# Altium PCB iTOP4412_convertor_4.3Clasics_v1_5.PcbDoc (part 1 of 2)
Units mil, origin at the board's own origin, x right, y up, seen from the top; angles counter-clockwise.
Board outline 4346 x 3286 mil, 2 copper layers (TOP, BOTTOM), stack 10.4 mil thick; 67 components, 78 nets, 328 pads, 290 vias.
Unrouted connection lines stored in the file: 26.
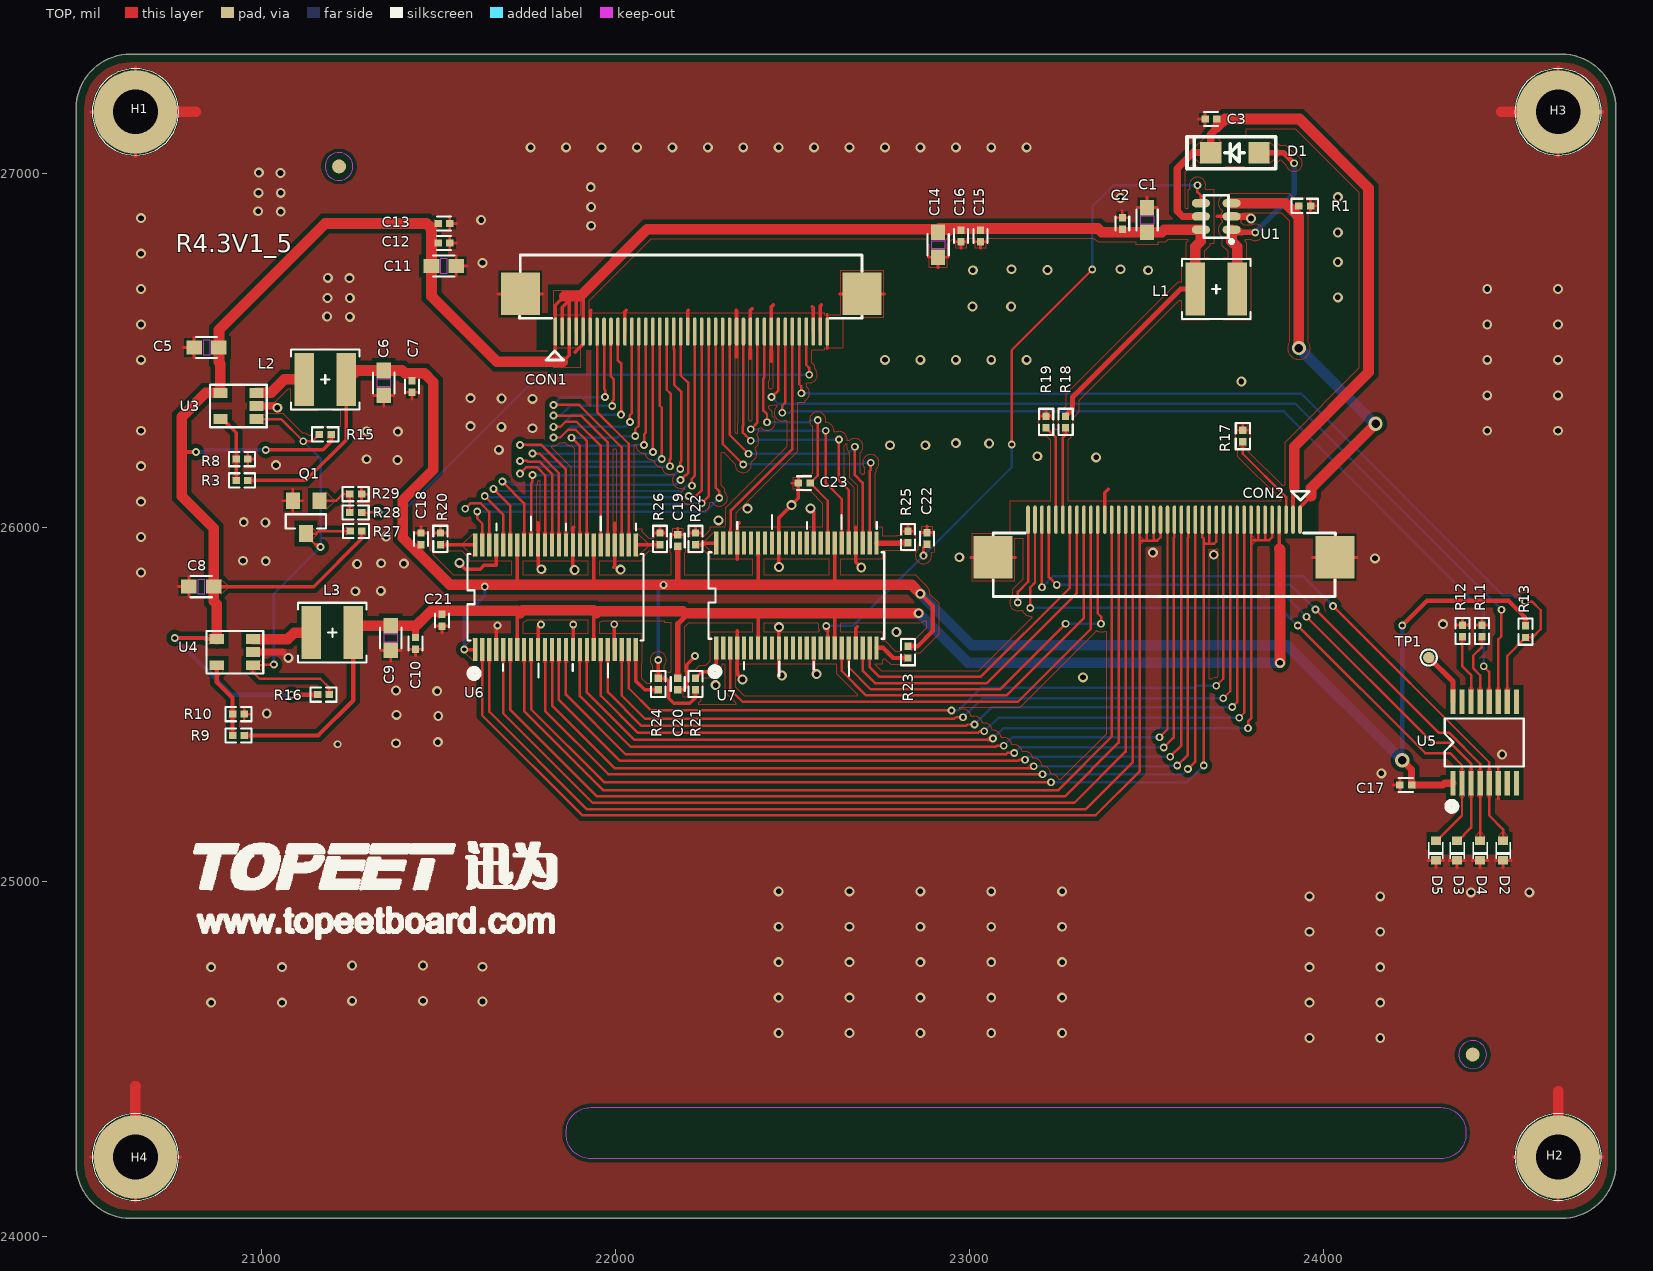
[diagram p0: TOP view]
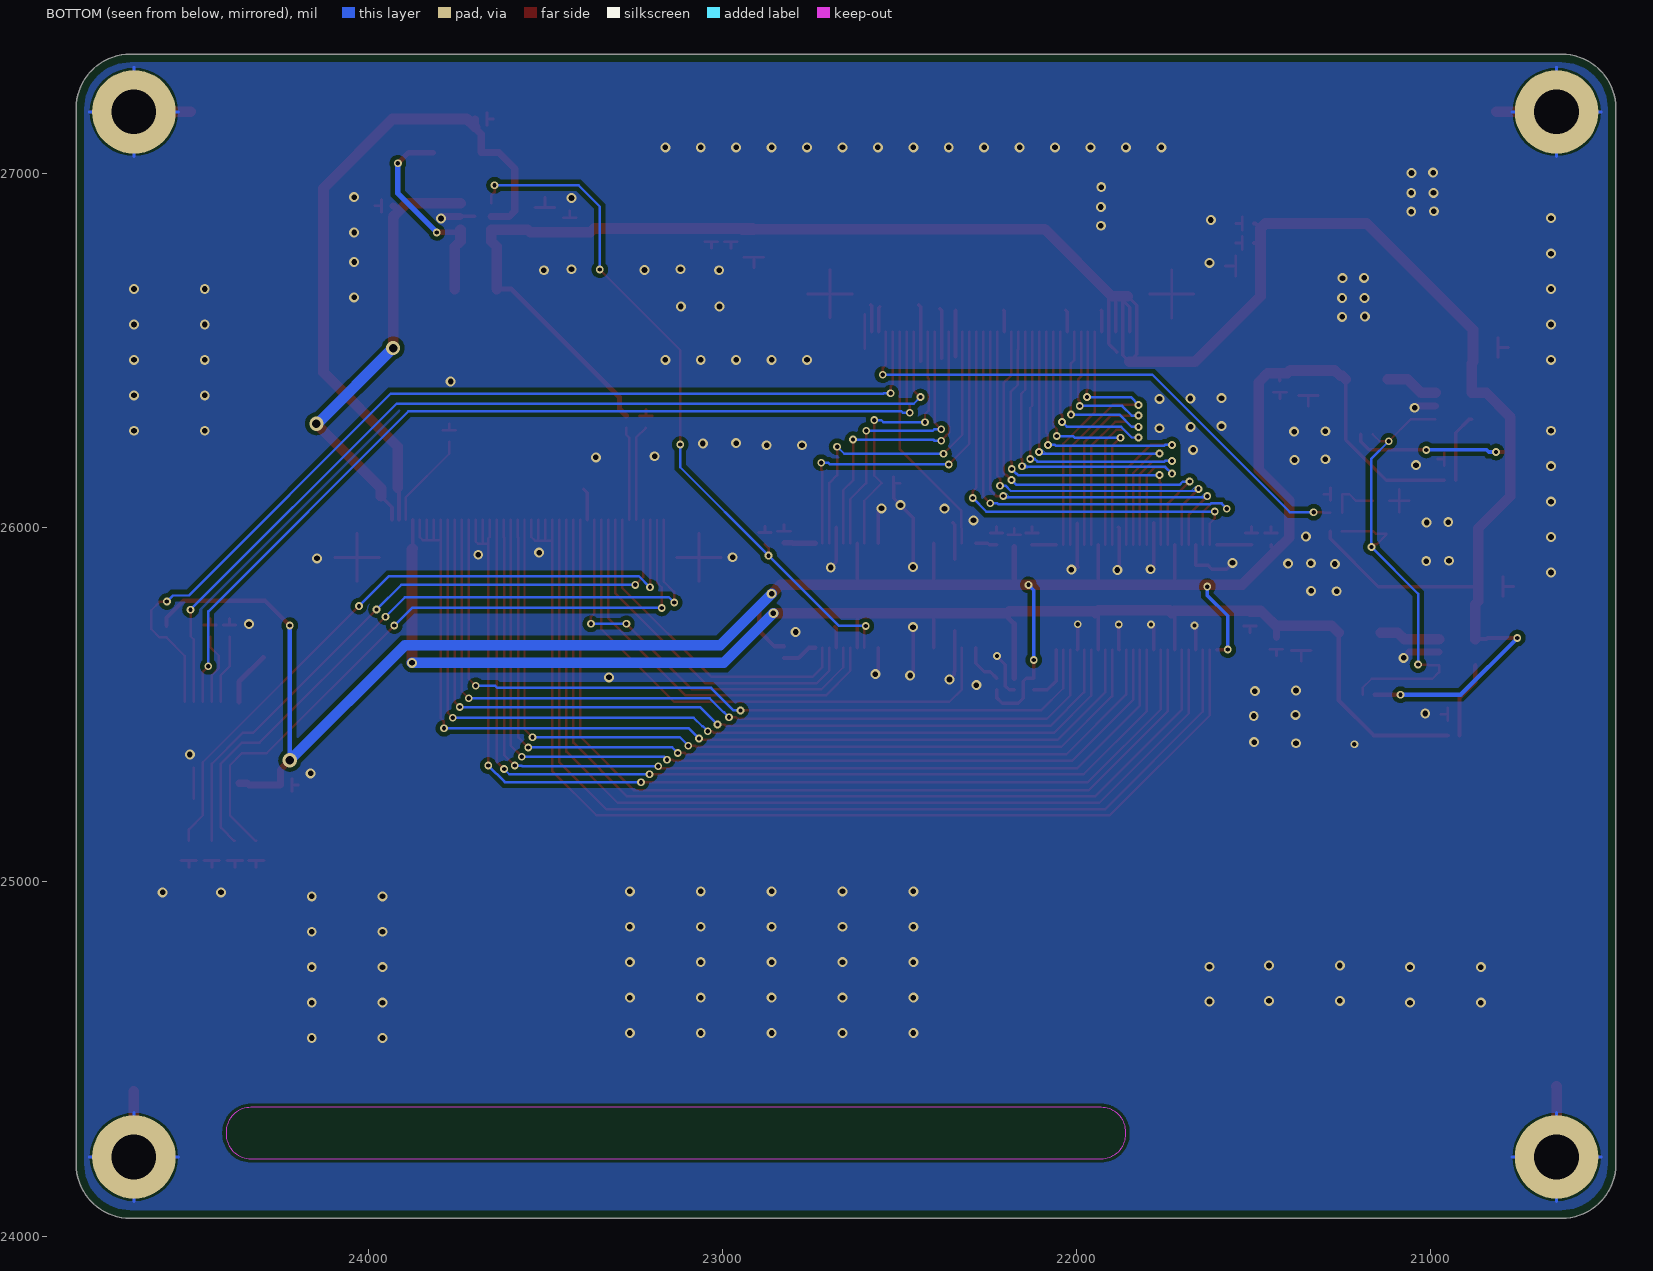
[diagram p1: BOTTOM view, seen from below]

## Layer stack, top to bottom
TOP: signal copper 1.2
Dielectric: core 8, FR-4, Dk 4.5
BOTTOM: signal copper 1.2

## Board outline
20478.08,24203.41 ccw(c20631.08,24203.41) 20631.08,24050.41 24671.08,24050.41 ccw(c24671.08,24203.41) 24824.08,24203.41 24824.08,27183.41 ccw(c24671.08,27183.41) 24671.08,27336.41 20631.08,27336.41 ccw(c20631.08,27183.41) 20478.08,27183.41

## Design rules (kind name [scope] priority, off if disabled: settings)
Clearance [All] p1: gap=10
PlaneConnect [All] p1: planeconnectstyle=Direct reliefexpansion=20 reliefentries=4 reliefconductorwidth=10 reliefairgap=10
PolygonConnect [All] p1: connectstyle=Direct reliefconductorwidth=10 reliefentries=4 polygonreliefangle="90 Angle"
RoutingVias [All] p1: holewidth=28 width=50 viastyle="Through Hole" minholewidth=28 minwidth=50 maxholewidth=28 maxwidth=50
SilkscreenOverComponentPads [All] p1: minsilkscreentomaskgap=10
SolderMaskExpansion [All] p1: expansion=4
Width [All] p1: maxlimit=10 minlimit=10 preferedwidth=10 impedancedriven=TRUE minimp=88.540000 maximp=121.240000 favimp=73.760000
26 further rules are at their usual default settings.

## Components (designator, comment, footprint, x,y, rotation, side; value= is the part's Value field where it differs from the comment)
C1 "CAP POL_C0603_10UF/16V" C0603 23501.08,26868.41 r90 top
C2 "C1005_C0402_0.1UF" C0402 23431.08,26858.41 r270 top
C3 "C1005_C0402_1UF/25V" C0402 23681.08,27153.41 r0 top
C5 "C1005_C0603_4.7UF" C0603 20846.08,26508.41 r0 top
C6 "C1005_C0603_10UF" C0603 21346.08,26408.41 r90 top
C7 "C1005_C0402_0.1UF" C0402 21426.08,26398.41 r90 top
C8 "C1005_C0603_4.7UF" C0603 20831.08,25833.41 r0 top
C9 "C1005_C0603_10UF" C0603 21366.08,25688.41 r90 top
C10 "C1005_C0402_0.1UF" C0402 21436.08,25673.41 r90 top
C11 "C1608_C0603_10UF" C0603 21516.08,26738.41 r0 top
C12 "C0402_0_C0402_1UF" C0402 21516.08,26803.41 r0 top
C13 "C0402_0_C0402_0.1UF" C0402 21516.08,26858.41 r0 top
C14 "C1608_C0603_10UF" C0603 22911.08,26798.41 r270 top
C15 "C0402_0_C0402_100NF" C0402 23031.08,26823.41 r270 top
C16 "C0402_0_C0402_100NF" C0402 22976.08,26823.41 r270 top
C17 "C0603_0_C0402_0.1UF" C0402 24231.08,25273.41 r180 top
C18 "C0603_0_C0402_0.1UF" C0402 21451.08,25968.41 r90 top
C19 "C0603_0_C0402_0.1UF" C0402 22176.08,25963.41 r90 top
C20 "C0603_0_C0402_0.1UF" C0402 22176.08,25558.41 r270 top
C21 "C0603_0_C0402_0.1UF" C0402 21511.08,25738.41 r270 top
C22 "C1005_C0402_0.1UF" C0402 22880.08,25969.41 r270 top
C23 "C0603_0_C0402_0.1UF" C0402 22533.08,26125.41 r0 top
CON1 "CON40_0_1_FPC40-050_CON40_0_5MM" FPC40-050 22213.04,26643.96 r0 top
CON2 "CON40_0_1_FPC40-050_CON40_0_5MM" FPC40-050 23549.77,25931.85 r180 top
D1 "DIODE SCHOTTKY_D1206_IN5819" D1206 23746.08,27058.41 r0 top
D2 "BZX84C10/SOT_1_SOD-523_BZX84C10" SOD-523 24506.08,25088.41 r90 top
D3 "BZX84C10/SOT_1_SOD-523_BZX84C10" SOD-523 24376.08,25088.41 r90 top
D4 "BZX84C10/SOT_1_SOD-523_BZX84C10" SOD-523 24441.08,25088.41 r90 top
D5 "BZX84C10/SOT_1_SOD-523_BZX84C10" SOD-523 24316.08,25088.41 r90 top
H1 "TP_P0_0.8_D0_HOLE3_2X6_TP_P0_0." HOLE3_2X6 20645.33,27173.41 r0 top
H2 "TP_P0_0.8_D0_HOLE3_2X6_TP_P0_0." HOLE3_2X6 24661.08,24223.41 r0 top
H3 "TP_P0_0.8_D0_HOLE3_2X6_TP_P0_0." HOLE3_2X6 24661.08,27173.41 r0 top
H4 "TP_P0_0.8_D0_HOLE3_2X6_TP_P0_0." HOLE3_2X6 20645.33,24223.41 r0 top
L1 "LQH32C_1_IND4018_10UH" IND4018 23696.08,26673.41 r0 top
L2 "LQH32C_1_IND4018_2.2UH" IND4018 21181.08,26418.41 r0 top
L3 "LQH32C_1_IND4018_2.2UH" IND4018 21201.08,25703.41 r0 top
Q1 "L14P2/TO_1_SOT-23_L9014" SOT-23 21127.08,26029.41 r0 top
R1 "R1005_0_R0402_5.1R" R0402 23946.08,26908.41 r0 top
R3 "R1005_0_R0402_? 1%" R0402 20946.08,26133.41 r180 top
R8 "R1005_0_R0402_? 1%" R0402 20946.08,26193.41 r0 top
R9 "R1005_0_R0402_430K 1%" R0402 20936.08,25413.41 r180 top
R10 "R1005_0_R0402_100K 1%" R0402 20936.08,25473.41 r0 top
R11 "R0603_0_R0402_0R" R0402 24446.08,25708.41 r90 top
R12 "R0603_0_R0402_0R" R0402 24391.08,25708.41 r90 top
R13 "R0603_0_R0402_10K" R0402 24569.08,25706.41 r90 top
R15 "R0603_0_R0402_NC" R0402 21181.08,26263.41 r0 top
R16 "R0603_0_R0402_NC" R0402 21176.08,25528.41 r180 top
R17 "R0603_0_R0402_10K/NC" R0402 23771.08,26258.41 r90 top
R18 "R0603_0_R0402_0R" R0402 23271.08,26298.41 r90 top
R19 "R0603_0_R0402_10K/NC" R0402 23216.08,26298.41 r90 top
R20 "R0603_0_R0402_10K" R0402 21506.08,25968.41 r90 top
R21 "R0603_0_R0402_10K" R0402 22226.08,25558.41 r270 top
R22 "R0603_0_R0402_10K" R0402 22226.08,25968.41 r270 top
R23 "R0603_0_R0402_10K" R0402 22826.08,25648.41 r90 top
R24 "R0603_0_R0402_10K" R0402 22121.08,25558.41 r90 top
R25 "R0603_0_R0402_10K" R0402 22826.08,25973.41 r90 top
R26 "R0603_0_R0402_10K" R0402 22126.08,25968.41 r90 top
R27 "R_R0402_10K" R0402 21268.08,25990.41 r180 top
R28 "R_R0402_1K" R0402 21267.08,26042.41 r0 top
R29 "R_R0402_10K" R0402 21267.08,26094.41 r0 top
TP1 "TP_P0_0.8_D0_TP0_8-SMD_AUX" TP0_8-SMD 24296.08,25633.41 r0 top
U1 "TP3984_SOT23-6L_TP3984" SOT23-6L 23696.08,26878.41 r90 top
U3 "RT8059_TSOT-23-5_RT8059" TSOT-23-5 20936.08,26343.41 r90 top
U4 "RT8059_TSOT-23-5_RT8059" TSOT-23-5 20926.08,25648.41 r90 top
U5 "U-TSC2007IPW_TSSOP16_TSC2007IPW" TSSOP16 24453.08,25393.41 r90 top
U6 "74ALVC164245DGG" TSSOP_48 21831.08,25803.41 r0 top
U7 "74ALVC164245DGG" TSSOP_48 22511.08,25808.41 r0 top

## Footprints (in the part's own frame and the unit in brackets; to place one, negate y for a bottom-side part, rotate by r counter-clockwise, add the part's x,y. Pads: shape width x height; smd on the part's side, far side on the other; paste and mask are expansions set on the pad)
C0402 [mil] "C0402"
  rect 21x20 smd: 1(-16.5,0) 2(16.5,0)
  silkscreen extent -20,-20 20,20
C0603 [mil] "C0603"
  rect 44x40 smd: 1(-35,0) 2(35,0)
  TOP keep-out region: -10,-20 10,-20 10,20 -10,20 -10,-20
  silkscreen extent -30,-30 30,30
D1206 [mil] "D1206"
  rect 60x60 smd: 1(70.49,0) 2(-65.49,0)
  silkscreen extent -132,-45 118,45
FPC40-050 [mil] "FPC40-050"
  oval 10x80 smd: 1(-382.82,-90.55) 2(-363.13,-90.55) 3(-343.44,-90.55) 4(-323.76,-90.55) 5(-304.08,-90.55) 6(-284.39,-90.55) 7(-264.71,-90.55) 8(-245.02,-90.55) 9(-225.33,-90.55) 10(-205.65,-90.55) 11(-185.97,-90.55) 12(-166.28,-90.55) 13(-146.6,-90.55) 14(-126.91,-90.55) 15(-107.23,-90.55) 16(-87.54,-90.55) 17(-67.85,-90.55) 18(-48.17,-90.55) 19(-28.49,-90.55) 20(-8.8,-90.55) 21(10.89,-90.55) 22(30.57,-90.55) 23(50.26,-90.55) 24(69.94,-90.55) 25(89.63,-90.55) 26(109.31,-90.55) 27(129,-90.55) 28(148.68,-90.55) 29(168.37,-90.55) 30(188.05,-90.55) 31(207.74,-90.55) 32(227.42,-90.55) 33(247.11,-90.55) 34(266.79,-90.55) 35(286.48,-90.55) 36(306.16,-90.55) 37(325.85,-90.55) 38(345.53,-90.55) 39(365.22,-90.55) 40(384.9,-90.55)
  rect 110x120 smd: 41(-481.24,15.75) 42(483.33,15.75)
  silkscreen extent -483,-171 483,126
HOLE3_2X6 [mil] "HOLE3_2X6"
  round 236 hole 126: 1(0,0)
  silkscreen extent -122,-122 122,122
IND4018 [mm] "IND4018"
  rect 1.4x3.8 smd: 1(-1.5,0) 2(1.5,0)
  silkscreen extent -2.45,-2.15 2.45,2.15
R0402 [mil] "R0402"
  rect 21x20 smd: 1(-16.5,0) 2(16.5,0)
  silkscreen extent -37,-20 37,20
SOD-523 [mm] "SOD-523"
  rect 0.61x0.71 smd: 1(-0.7,0) 2(0.7,0)
  silkscreen extent -0.6,-0.5 0.6,0.5
SOT23-6L [mm] "SOT23-6L"
  oval 0.6x1.3 smd: 1(-0.95,-1.1) 2(0,-1.1) 3(0.95,-1.1) 4(0.95,1.1) 5(0,1.1) 6(-0.95,1.1)
  silkscreen extent -1.93,-1.23 1.52,0.87
SOT-23 [mm] "SOT-23"
  rect 1x1.2 smd: 1(0.953,1.175) 2(-0.953,1.175) 3(-0.013,-1.175)
  silkscreen extent -1.46,-0.81 1.44,0.21
TP0_8-SMD [mm] "TP0_8-SMD"
  round 0.8 smd: 1(0,0)
  silkscreen extent -0.58,-0.58 0.58,0.58
TSOT-23-5 [mil] "TSOT-23-5"
  rect 28x40 smd: 1(-37,-51) 2(0,-51) 3(37,-51) 4(37,51) 5(-37,51)
  silkscreen extent -60,-80 60,80
TSSOP16 [mil] "TSSOP16"
  rect 70x15 smd: 1(-115,88.8) 2(-115,63.2) 3(-115,37.6) 4(-115,12) 5(-115,-13.6) 6(-115,-39.2) 7(-115,-64.8) 8(-115,-90.4) 9(115,-90.4) 10(115,-64.8) 11(115,-39.2) 12(115,-13.6) 13(115,12) 14(115,37.6) 15(115,63.2) 16(115,88.8)
  silkscreen extent -191,-111 68,112
TSSOP_48 [mil] "TSSOP_48"
  rect 12x65 smd: 1(-226.38,-147.64) 2(-206.69,-147.64) 3(-187.01,-147.64) 4(-167.32,-147.64) 5(-147.64,-147.64) 6(-127.95,-147.64) 7(-108.27,-147.64) 8(-88.58,-147.64) 9(-68.9,-147.64) 10(-49.21,-147.64) 11(-29.53,-147.64) 12(-9.84,-147.64) 13(9.84,-147.64) 14(29.53,-147.64) 15(49.21,-147.64) 16(68.9,-147.64) 17(88.58,-147.64) 18(108.27,-147.64) 19(127.95,-147.64) 20(147.64,-147.64) 21(167.32,-147.64) 22(187.01,-147.64) 23(206.69,-147.64) 24(226.38,-147.64) 25(226.38,147.64) 26(206.69,147.64) 27(187.01,147.64) 28(167.32,147.64) 29(147.64,147.64) 30(127.95,147.64) 31(108.27,147.64) 32(88.58,147.64) 33(68.9,147.64) 34(49.21,147.64) 35(29.53,147.64) 36(9.84,147.64) 37(-9.84,147.64) 38(-29.53,147.64) 39(-49.21,147.64) 40(-68.9,147.64) 41(-88.58,147.64) 42(-108.27,147.64) 43(-127.95,147.64) 44(-147.64,147.64) 45(-167.32,147.64) 46(-187.01,147.64) 47(-206.69,147.64) 48(-226.38,147.64)
  silkscreen extent -248,-226 248,228

## Free pads (board coordinates)
  round 39.37 smd: ""(21220.08,27019.41) ""(24420.08,24512.41)

## Via types
v1: diameter 28, hole 16, TOP to BOTTOM, 182 vias
v2: diameter 22, hole 12, TOP to BOTTOM, 105 vias
v3: diameter 40, hole 24, TOP to BOTTOM, 3 vias

## Nets (pads, with @x,y where several pads share a name; then routed paths per layer and width w, separated by ;. In a path a pad name is that pad's centre, name@x,y a point inside that pad or via, vN(x,y) a via of type N, cw(c..) or ccw(c..) an arc to the next point about the centre after c; other vN are vias at no path point)
BUF_LCD_DEN: CON2.34 U7.23 | length 927.4
  TOP w7: U7.23@22717.77,25660.76 22717.77,25606.72 22746.08,25578.41 23031.08,25578.41 23282.98,25830.3 CON2.34@23282.98,26022.41
BUF_LCD_HSYNC: CON2.32 U7.19 | length 1145.4
  TOP w7: U7.19@22639.03,25660.76 22639.03,25595.46 22708.08,25526.41 23104.08,25526.41 23322.35,25744.67 CON2.32@23322.35,26022.41
BUF_LCD_VD3: CON2.21 CON2.22 CON2.23 CON2.24 U6.2 | length 3151.6
  TOP w7: U6.2@21624.39,25655.76 21624.39,25470.1 21906.08,25188.41 23356.08,25188.41 23479.83,25312.15 23479.83,25963.41 ; CON2.24@23479.83,26022.41 23479.83,25963.41 ; CON2.23@23499.51,26022.41 23499.51,25964.98 23501.08,25963.41 ; CON2.22@23519.2,26022.41 23519.2,25966.29 23522.08,25963.41 ; CON2.21@23538.88,26022.41 23538.88,25972.91 23529.38,25963.41 23522.08,25963.41 ; 23479.83,25963.41 23501.08,25963.41 ; 23501.08,25963.41 23522.08,25963.41
BUF_LCD_VD4: CON2.25 U6.3 | length 2845
  TOP w7: U6.3@21644.07,25655.76 21644.07,25480.42 21919.08,25205.41 23328.08,25205.41 23460.14,25337.47 CON2.25@23460.14,26022.41
BUF_LCD_VD5: CON2.26 U6.5 | length 2755.8
  TOP w7: U6.5@21683.44,25655.76 21683.44,25476.05 21936.08,25223.41 23296.08,25223.41 23440.46,25367.78 CON2.26@23440.46,26022.41
BUF_LCD_VD6: CON2.27 U6.6 | length 2680.7
  TOP w7: U6.6@21703.13,25655.76 21703.13,25486.35 21948.08,25241.41 23269.08,25241.41 23420.77,25393.1 CON2.27@23420.77,26022.41
BUF_LCD_VD7: CON2.28 U6.8 | length 2599.9
  TOP w7: U6.8@21742.5,25655.76 21742.5,25481.99 21966.08,25258.41 23249.08,25258.41 23401.09,25410.41 CON2.28@23401.09,26022.41
BUF_LCD_VD10: CON2.13 CON2.14 CON2.15 U6.9 | length 3037.2
  TOP w7: U6.9@21762.18,25655.76 21762.18,25487.31 21968.08,25281.41 v2(23230.08,25281.41) ; CON2.15@23656.99,26022.41 23656.99,25972.91 23661.08,25968.82 23661.08,25958.41 ; v2(23661.08,25328.41) 23661.08,25958.41 ; CON2.14@23676.68,26022.41 23676.68,25954.81 23677.08,25954.41 ; CON2.13@23696.36,26022.41 23696.36,25960.69 23690.08,25954.41 23677.08,25954.41 ; 23661.08,25958.41 23665.08,25954.41 23677.08,25954.41
  BOTTOM w7: v2(23230.08,25281.41) 23614.08,25281.41 v2(23661.08,25328.41)
BUF_LCD_VD11: CON2.16 U6.11 | length 2780.3
  TOP w7: U6.11@21801.55,25655.76 21801.55,25482.94 21980.58,25303.91 v2(23206.08,25303.91) ; v2(23616.08,25318.41) 23637.31,25339.63 CON2.16@23637.31,26022.41
  BOTTOM w7: v2(23206.08,25303.91) 23601.58,25303.91 v2(23616.08,25318.41)
BUF_LCD_VD12: CON2.17 U6.12 | length 2706.4
  TOP w7: U6.12@21821.24,25655.76 21821.24,25498.24 21999.08,25320.41 23175.08,25320.41 v2(23181.08,25326.41) ; v2(23586.08,25328.41) 23616.08,25358.41 23616.08,25971.37 23617.62,25972.91 CON2.17@23617.62,26022.41
  BOTTOM w7: v2(23181.08,25326.41) 23564.58,25326.41 23566.58,25328.41 v2(23586.08,25328.41)
BUF_LCD_VD13: CON2.18 U6.13 | length 2625.8
  TOP w7: U6.13@21840.92,25655.76 21840.92,25513.57 22013.08,25341.41 23136.08,25341.41 23139.58,25344.91 v2(23156.08,25344.91) ; v2(23566.08,25353.41) 23597.94,25385.26 CON2.18@23597.94,26022.41
  BOTTOM w7: v2(23156.08,25344.91) 23164.58,25353.41 v2(23566.08,25353.41)
BUF_LCD_VD14: CON2.19 U6.14 | length 2547.5
  TOP w7: U6.14@21860.61,25655.76 21860.61,25528.88 22029.08,25360.41 23103.08,25360.41 23106.58,25363.91 v2(23126.08,25363.91) ; v2(23548.08,25379.41) 23576.08,25407.41 23576.08,25970.74 23578.25,25972.91 CON2.19@23578.25,26022.41
  BOTTOM w7: v2(23126.08,25363.91) 23141.58,25379.41 v2(23548.08,25379.41)
BUF_LCD_VD15: CON2.20 U6.16 | length 2461.1
  TOP w7: U6.16@21899.98,25655.76 21899.98,25524.5 22043.08,25381.41 23073.58,25381.41 23076.58,25384.41 v2(23096.08,25384.41) ; v2(23536.08,25408.41) 23558.57,25430.89 CON2.20@23558.57,26022.41
  BOTTOM w7: v2(23096.08,25384.41) 23120.08,25408.41 v2(23536.08,25408.41)
BUF_LCD_VD19: CON2.5 CON2.6 CON2.7 CON2.8 U6.17 | length 2876.8
  TOP w7: U6.17@21919.66,25655.76 21919.66,25534.83 22053.08,25401.41 23062.58,25401.41 v2(23066.08,25404.91) ; v2(23786.08,25433.41) 23786.08,25452.91 23794.79,25461.61 23794.79,25964.41 ; CON2.8@23794.79,26022.41 23794.79,25964.41 ; CON2.7@23814.47,26022.41 23814.47,25964.8 23814.08,25964.41 ; CON2.6@23834.16,26022.41 23834.16,25964.48 23834.08,25964.41 ; CON2.5@23853.84,26022.41 23853.84,25972.91 23845.34,25964.41 23834.08,25964.41 ; 23794.79,25964.41 23814.08,25964.41 ; 23814.08,25964.41 23834.08,25964.41
  BOTTOM w7: v2(23066.08,25404.91) 23094.58,25433.41 v2(23786.08,25433.41)
BUF_LCD_VD20: CON2.9 U6.19 | length 2558.5
  TOP w7: U6.19@21959.03,25655.76 21959.03,25525.46 22064.08,25420.41 23024.08,25420.41 23029.08,25425.41 v2(23041.08,25425.41) ; v2(23761.08,25463.41) 23775.1,25477.43 CON2.9@23775.1,26022.41
  BOTTOM w7: v2(23041.08,25425.41) 23054.87,25439.19 23056.87,25439.19 23081.08,25463.41 v2(23761.08,25463.41)
BUF_LCD_VD21: CON2.10 U6.20 | length 2478.7
  TOP w7: U6.20@21978.72,25655.76 21978.72,25535.76 22074.08,25440.41 22990.21,25440.41 22994.09,25444.29 v2(23013.59,25444.29) ; v2(23741.08,25493.41) 23754.87,25507.19 23754.87,25517.19 23755.42,25517.74 CON2.10@23755.42,26022.41
  BOTTOM w7: v2(23013.59,25444.29) 23062.71,25493.41 v2(23741.08,25493.41)
BUF_LCD_VD22: CON2.11 U6.22 | length 2390.9
  TOP w7: U6.22@22018.09,25655.76 22018.09,25526.39 22084.08,25460.41 22957.2,25460.41 22961.58,25464.79 v2(22981.08,25464.79) ; v2(23716.08,25518.41) 23735.73,25538.06 CON2.11@23735.73,26022.41
  BOTTOM w7: v2(22981.08,25464.79) 22994.87,25478.58 22996.25,25478.58 23036.08,25518.41 v2(23716.08,25518.41)
BUF_LCD_VD23: CON2.12 U6.23 | length 2299.4
  TOP w7: U6.23@22037.77,25655.76 22037.77,25546.72 22100.58,25483.91 v2(22949.06,25483.91) ; v2(23696.08,25553.41) 23716.05,25573.37 CON2.12@23716.05,26022.41
  BOTTOM w7: v2(22949.06,25483.91) 22968.56,25483.91 23032.06,25547.41 23289.87,25547.41 ; 23289.88,25547.41 23635.08,25547.41 23641.08,25553.41 v2(23696.08,25553.41)
BUF_LCD_VOTCLK: CON2.30 U7.20 | length 1167.7
  TOP w7: U7.20@22658.72,25660.76 22658.72,25605.76 22721.08,25543.41 23086.08,25543.41 v2(23271.08,25728.41) ; CON2.30@23361.72,26022.41 23361.72,25757.77 23371.08,25748.41 v2(23371.08,25728.41)
  BOTTOM w7: v2(23271.08,25728.41) v2(23371.08,25728.41)
BUF_LCD_VSYNC: CON2.33 U7.22 | length 996.7
  TOP w7: U7.22@22698.09,25660.76 22698.09,25596.39 22734.08,25560.41 23048.08,25560.41 23302.66,25814.99 CON2.33@23302.66,26022.41
BUF_MD_RSTN: CON2.31 U7.3 | length 1543.2
  TOP w7: U7.3@22324.07,25660.76 22324.07,25543.42 22359.08,25508.41 23136.08,25508.41 23342.03,25714.35 CON2.31@23342.03,26022.41
BUF_XPWMTOUT1: C22.2 U1.4 U7.17 | length 2016
  TOP w7: v2(22595.08,25722.41) 22599.66,25717.83 U7.17@22599.66,25660.76 ; v2(22869.58,25920.91) 22869.58,25942.41 C22.2@22880.08,25952.91 ; v2(23119.08,26234.41) 23119.08,26501.41 v2(23346.08,26728.41) ; v2(23643.08,26966.41) 23643.08,26946.82 23652.78,26937.12 U1.4@23652.78,26915.81
  BOTTOM w7: v2(22595.08,25722.41) 22671.08,25722.41 v2(22869.58,25920.91) 23119.08,26170.41 v2(23119.08,26234.41) ; v2(23346.08,26728.41) 23346.08,26906.41 23406.08,26966.41 v2(23643.08,26966.41)
CAM5M_RST: CON1.37 R28.2 | length 1549.9
  TOP w7: R28.2@21283.58,26042.41 21303.58,26042.41 21304.58,26043.41 v2(21331.08,26043.41) ; CON1.37@22538.88,26553.41 22538.88,26459.3 22547.08,26451.1 v2(22547.08,26431.6)
  BOTTOM w7: v2(21331.08,26043.41) 21398.08,26043.41 21786.28,26431.6 v2(22547.08,26431.6)
DC33V: C9.2 C10.2 C20.1 C21.1 CON2.4 L3.2 R9.1 U6.7 U6.18 U7.7 U7.18 | length 4334
  TOP w10: U6.7@21722.81,25655.76 21722.81,25750.13 21731.08,25758.41 ; U6.18@21939.35,25655.76 21939.35,25751.68 21946.08,25758.41 ; 22401.08,25758.41 22402.81,25756.68 U7.7@22402.81,25660.76 ; 22611.08,25758.41 22619.35,25750.13 U7.18@22619.35,25660.76 ; 23873.53,25940.85 CON2.4@23873.53,26022.41
  TOP w12: R9.1@20952.58,25413.41 21161.08,25413.41 21260.14,25512.46 L3.2@21260.14,25703.41
  TOP w15: 21473.08,25758.41 21476.58,25754.91 C21.1@21511.08,25754.91 ; C20.1@22176.08,25574.91 22176.08,25728.41 22196.08,25748.41 22196.08,25758.41
  TOP w20: C10.2@21436.08,25689.91 21436.08,25721.41
  TOP w30: L3.2@21260.14,25703.41 21280.14,25723.41 C9.2@21366.08,25723.41 21434.08,25723.41 21436.08,25721.41 21473.08,25758.41 21480.08,25765.41 21724.08,25765.41 21731.08,25758.41 21739.08,25766.41 21938.08,25766.41 21946.08,25758.41 21952.08,25764.41 22190.08,25764.41 22196.08,25758.41 22401.08,25758.41 22611.08,25758.41 v1(22856.08,25758.41) ; 23873.53,25940.85 23876.08,25938.3 v1(23876.08,25618.41)
  BOTTOM w30: v1(22856.08,25758.41) 22996.08,25618.41 v1(23876.08,25618.41)
GND: C1.2 C2.1 C3.1 C5.1 C6.1 C7.1 C8.1 C9.1 C10.1 C11.2 C12.2 C13.2 C14.2 C15.2 C16.2 C17.2 C18.2 C19.2 C20.2 C21.2 C22.1 C23.1 CON1.6 CON1.11 CON1.20 CON1.27 CON1.29 CON1.32 CON1.38 CON1.39 CON1.40 CON1.41 CON1.42 CON2.29 CON2.41 CON2.42 D2.1 D3.1 D4.1 D5.1 H1.1 H2.1 H3.1 H4.1 Q1.2 R1.2 R8.2 R10.2 R11.2 R12.2 R17.2 R19.2 R20.2 R22.1 R25.2 R26.2 R29.2 U1.2 U3.2 U4.2 U5.6 U6.4 U6.10 U6.15 U6.21 U6.28 U6.34 U6.39 U6.45 U7.4 U7.10 U7.15 U7.21 U7.28 U7.34 U7.39 U7.45 | length 10945.7
  TOP w8: 20519.33,24223.41 H4.1@20645.33,24223.41 ; 20519.33,27173.41 H1.1@20645.33,27173.41 ; 20645.33,24097.4 H4.1@20645.33,24223.41 ; 20645.33,27047.4 H1.1@20645.33,27173.41 ; 20645.33,27299.41 H1.1@20645.33,27173.41 ; 20766.08,25833.41 C8.1@20796.08,25833.41 ; 20771.34,24223.41 H4.1@20645.33,24223.41 ; 20781.08,26508.41 C5.1@20811.08,26508.41 ; 20796.08,25805.4 C8.1@20796.08,25833.41 ; 20796.08,25861.41 C8.1@20796.08,25833.41 ; 20811.08,26480.4 C5.1@20811.08,26508.41 ; 20811.08,26536.41 C5.1@20811.08,26508.41 ; 20952.58,25455.4 R10.2@20952.58,25473.41 ; 20952.58,25491.41 R10.2@20952.58,25473.41 ; 20962.58,26175.4 R8.2@20962.58,26193.41 ; 20962.58,26211.41 R8.2@20962.58,26193.41 ; 20971.08,25473.41 R10.2@20952.58,25473.41 ; 20981.08,26193.41 R8.2@20962.58,26193.41 ; 21061.9,26075.66 Q1.2@21089.58,26075.66 ; 21089.58,26044.03 Q1.2@21089.58,26075.66 ; 21089.58,26107.28 Q1.2@21089.58,26075.66 ; 21117.27,26075.66 Q1.2@21089.58,26075.66 ; 21283.58,26076.4 R29.2@21283.58,26094.41 ; 21283.58,26112.41 R29.2@21283.58,26094.41 ; 21302.08,26094.41 R29.2@21283.58,26094.41 ; 21318.08,26373.41 C6.1@21346.08,26373.41 ; 21338.08,25653.41 C9.1@21366.08,25653.41 ; 21346.08,26343.4 C6.1@21346.08,26373.41 ; 21366.08,25623.4 C9.1@21366.08,25653.41 ; 21374.08,26373.41 C6.1@21346.08,26373.41 ; 21394.08,25653.41 C9.1@21366.08,25653.41 ; 21408.08,26381.91 C7.1@21426.08,26381.91 ; 21418.08,25656.91 C10.1@21436.08,25656.91 ; 21426.08,26363.4 C7.1@21426.08,26381.91 ; 21433.08,25984.91 C18.2@21451.08,25984.91 ; 21436.08,25638.4 C10.1@21436.08,25656.91 ; 21444.08,26381.91 C7.1@21426.08,26381.91 ; 21451.08,26003.41 C18.2@21451.08,25984.91 ; 21454.08,25656.91 C10.1@21436.08,25656.91 ; 21469.08,25984.91 C18.2@21451.08,25984.91 ; 21488.08,25984.91 R20.2@21506.08,25984.91 ; 21493.08,25721.91 C21.2@21511.08,25721.91 ; 21506.08,26003.41 R20.2@21506.08,25984.91 ; 21511.08,25703.4 C21.2@21511.08,25721.91 ; 21524.08,25984.91 R20.2@21506.08,25984.91 ; 21529.08,25721.91 C21.2@21511.08,25721.91 ; 21532.58,26785.4 C12.2@21532.58,26803.41 ; 21532.58,26821.41 C12.2@21532.58,26803.41 ; 21532.58,26840.4 C13.2@21532.58,26858.41 ; 21532.58,26876.41 C13.2@21532.58,26858.41 ; 21551.08,26710.4 C11.2@21551.08,26738.41 ; 21551.08,26766.41 C11.2@21551.08,26738.41 ; 21551.08,26803.41 C12.2@21532.58,26803.41 ; 21551.08,26858.41 C13.2@21532.58,26858.41 ; 21581.08,26738.41 C11.2@21551.08,26738.41 ; 21668.8,26659.71 CON1.41@21731.8,26659.71 ; 21731.8,26591.7 CON1.41@21731.8,26659.71 ; 21731.8,26727.71 CON1.41@21731.8,26659.71 ; 21794.8,26659.71 CON1.41@21731.8,26659.71 ; 22108.08,25984.91 R26.2@22126.08,25984.91 ; 22126.08,26003.41 R26.2@22126.08,25984.91 ; 22144.08,25984.91 R26.2@22126.08,25984.91 ; 22158.08,25979.91 C19.2@22176.08,25979.91 ; 22176.08,25998.41 C19.2@22176.08,25979.91 ; 22194.08,25979.91 C19.2@22176.08,25979.91 ; 22208.08,25984.91 R22.1@22226.08,25984.91 ; 22226.08,26003.41 R22.1@22226.08,25984.91 ; 22244.08,25984.91 R22.1@22226.08,25984.91 ; 22498.08,26125.41 C23.1@22516.58,26125.41 22516.58,26143.41 ; 22597.94,26505.4 CON1.40@22597.94,26553.41 22597.94,26601.41 ; 22633.36,26659.71 CON1.42@22696.37,26659.71 ; 22696.37,26591.7 CON1.42@22696.37,26659.71 ; 22696.37,26727.71 CON1.42@22696.37,26659.71 ; 22759.37,26659.71 CON1.42@22696.37,26659.71 ; 22808.08,25989.91 R25.2@22826.08,25989.91 ; 22826.08,26008.41 R25.2@22826.08,25989.91 ; 22844.08,25989.91 R25.2@22826.08,25989.91 ; 22862.08,25985.91 C22.1@22880.08,25985.91 ; 22880.08,26004.41 C22.1@22880.08,25985.91 ; 22883.08,26763.41 C14.2@22911.08,26763.41 ; 22898.08,25985.91 C22.1@22880.08,25985.91 ; 22911.08,26733.4 C14.2@22911.08,26763.41 ; 22939.08,26763.41 C14.2@22911.08,26763.41 ; 22958.08,26806.91 C16.2@22976.08,26806.91 ; 22976.08,26788.4 C16.2@22976.08,26806.91 ; 22994.08,26806.91 C16.2@22976.08,26806.91 ; 23003.44,25916.11 CON2.42@23066.44,25916.11 ; 23013.08,26806.91 C15.2@23031.08,26806.91 ; 23031.08,26788.4 C15.2@23031.08,26806.91 ; 23049.08,26806.91 C15.2@23031.08,26806.91 ; 23066.44,25848.1 CON2.42@23066.44,25916.11 ; 23066.44,25984.11 CON2.42@23066.44,25916.11 ; 23129.44,25916.11 CON2.42@23066.44,25916.11 ; 23198.08,26314.91 R19.2@23216.08,26314.91 ; 23216.08,26333.41 R19.2@23216.08,26314.91 ; 23234.08,26314.91 R19.2@23216.08,26314.91 ; 23413.08,26874.91 C2.1@23431.08,26874.91 ; 23431.08,26893.41 C2.1@23431.08,26874.91 ; 23449.08,26874.91 C2.1@23431.08,26874.91 ; 23473.08,26903.41 C1.2@23501.08,26903.41 ; 23501.08,26933.41 C1.2@23501.08,26903.41 ; 23529.08,26903.41 C1.2@23501.08,26903.41 ; 23646.08,27153.41 C3.1@23664.58,27153.41 ; 23664.58,27135.4 C3.1@23664.58,27153.41 ; 23664.58,27171.41 C3.1@23664.58,27153.41 ; 23753.08,26274.91 R17.2@23771.08,26274.91 ; 23771.08,26293.41 R17.2@23771.08,26274.91 ; 23789.08,26274.91 R17.2@23771.08,26274.91 ; 23962.58,26890.4 R1.2@23962.58,26908.41 ; 23962.58,26926.41 R1.2@23962.58,26908.41 ; 23968.01,25916.11 CON2.41@24031.01,25916.11 ; 23981.08,26908.41 R1.2@23962.58,26908.41 ; 24031.01,25848.1 CON2.41@24031.01,25916.11 ; 24031.01,25984.11 CON2.41@24031.01,25916.11 ; 24094.01,25916.11 CON2.41@24031.01,25916.11 ; 24196.08,25273.41 C17.2@24214.58,25273.41 ; 24214.58,25255.4 C17.2@24214.58,25273.41 ; 24214.58,25291.41 C17.2@24214.58,25273.41 ; 24294.1,25060.85 D5.1@24316.08,25060.85 ; 24316.08,25040.83 D5.1@24316.08,25060.85 ; 24338.06,25060.85 D5.1@24316.08,25060.85 ; 24354.1,25060.85 D3.1@24376.08,25060.85 ; 24373.08,25724.91 R12.2@24391.08,25724.91 ; 24376.08,25040.83 D3.1@24376.08,25060.85 ; 24391.08,25743.41 R12.2@24391.08,25724.91 ; 24398.06,25060.85 D3.1@24376.08,25060.85 ; 24409.08,25724.91 R12.2@24391.08,25724.91 ; 24419.1,25060.85 D4.1@24441.08,25060.85 ; 24428.08,25724.91 R11.2@24446.08,25724.91 ; 24441.08,25040.83 D4.1@24441.08,25060.85 ; 24446.08,25743.41 R11.2@24446.08,25724.91 ; 24463.06,25060.85 D4.1@24441.08,25060.85 ; 24464.08,25724.91 R11.2@24446.08,25724.91 ; 24484.1,25060.85 D2.1@24506.08,25060.85 ; 24492.28,25235.4 U5.6@24492.28,25278.41 24492.28,25321.41 ; 24506.08,25040.83 D2.1@24506.08,25060.85 ; 24528.06,25060.85 D2.1@24506.08,25060.85 ; 24535.08,24223.41 H2.1@24661.08,24223.41 ; 24661.08,24097.4 H2.1@24661.08,24223.41 ; 24661.08,27047.4 H3.1@24661.08,27173.41 ; 24661.08,27299.41 H3.1@24661.08,27173.41 ; 24787.08,24223.41 H2.1@24661.08,24223.41 ; 24787.08,27173.41 H3.1@24661.08,27173.41
  TOP w10: v1@21041.08,26343.41 v1(21046.08,26338.41) ; 21061.08,25648.41 v1(21077.08,25632.41) ; v1(21560.08,25900.41) 21576.56,25882.96 21618.63,25882.96 21629.08,25893.41 21663.08,25893.41 21663.76,25894.09 U6.45@21663.76,25951.05 ; U6.4@21663.76,25655.76 21663.76,25720.09 v2(21667.08,25723.41) ; U6.10@21781.87,25655.76 21781.87,25718.2 v2(21790.08,25726.41) ; 21781.87,26013.2 U6.39@21781.87,25951.05 21781.87,25891.62 v1(21791.08,25882.41) ; U6.15@21880.29,25655.76 21881.08,25656.56 v2(21881.08,25726.41) ; 21882.08,26001.41 21880.29,25999.62 U6.34@21880.29,25951.05 21880.29,25885.2 v1(21885.08,25880.41) ; CON1.6@21928.65,26553.41 21928.65,26610.97 21931.08,26613.41 ; 21996.08,25888.41 21998.4,25890.72 U6.28@21998.4,25951.05 21998.4,26012.09 21998.08,26012.41 ; v2(21997.08,25727.41) 21997.08,25657.08 U6.21@21998.4,25655.76 ; CON1.11@22027.07,26553.41 22027.07,26609.4 22031.08,26613.41 ; C20.2@22176.08,25541.91 22190.03,25541.91 22201.08,25552.96 22201.08,25613.41 v2(22225.08,25637.41) ; CON1.20@22204.24,26553.41 22204.24,26611.56 22206.08,26613.41 ; 22341.08,26613.41 22342.03,26612.45 CON1.27@22342.03,26553.41 22342.03,26482.45 ; 22344.08,25708.41 22343.76,25708.09 U7.4@22343.76,25660.76 22343.76,25594.72 22345.08,25593.41 22345.08,25585.41 v1(22359.08,25571.41) ; 22344.08,25911.41 22343.76,25911.72 U7.45@22343.76,25956.05 22343.76,26008.09 22349.08,26013.41 ; 22381.08,26478.41 22381.4,26478.73 CON1.29@22381.4,26553.41 22381.4,26613.73 22386.08,26618.41 ; 22440.46,26469.03 CON1.32@22440.46,26553.41 22440.46,26622.78 22446.08,26628.41 ; v1(22461.87,25719.2) U7.10@22461.87,25660.76 22461.87,25590.62 v1(22470.08,25582.41) ; v1(22461.87,25888.62) U7.39@22461.87,25956.05 22461.87,26028.2 v1(22497.08,26063.41) 22516.58,26082.91 C23.1@22516.58,26125.41 ; v1(22551.08,26054.41) 22560.29,26045.2 U7.34@22560.29,25956.05 ; 22556.08,26623.41 22558.57,26620.92 CON1.38@22558.57,26553.41 ; U7.15@22560.29,25660.76 22560.29,25594.2 v1(22568.08,25586.41) ; CON1.39@22578.26,26553.41 22578.26,26625.58 22581.08,26628.41 ; U7.21@22678.4,25660.76 22678.4,25715.72 22683.08,25720.41 ; 22679.08,26000.41 22678.4,25999.72 U7.28@22678.4,25956.05 22678.4,25903.09 v1(22694.08,25887.41) ; CON2.29@23381.4,26022.41 23381.4,26098.72 23391.08,26108.41 ; 23699.08,26878.41 U1.2@23739.38,26878.41 ; v1@23788.08,26878.41 v1(23794.08,26872.41)
  TOP w20: U4.2@20977.08,25648.41 21061.08,25648.41 ; U3.2@20987.08,26343.41 v1@21041.08,26343.41 ; U1.2@23739.38,26878.41 v1@23788.08,26878.41
  TOP w30: H4.1@20645.33,24223.41 20645.33,24422.66 20646.08,24423.41 ; H1.1@20645.33,27173.41 20816.08,27173.41 ; 24501.08,27173.41 H3.1@24661.08,27173.41 ; H2.1@24661.08,24223.41 24661.08,24408.41
  BOTTOM w8: 20519.33,24223.41 H4.1@20645.33,24223.41 ; 20519.33,27173.41 H1.1@20645.33,27173.41 ; 20645.33,24097.4 H4.1@20645.33,24223.41 ; 20645.33,24349.41 H4.1@20645.33,24223.41 ; 20645.33,27047.4 H1.1@20645.33,27173.41 ; 20645.33,27299.41 H1.1@20645.33,27173.41 ; 20771.34,24223.41 H4.1@20645.33,24223.41 ; 20771.34,27173.41 H1.1@20645.33,27173.41 ; 24535.08,24223.41 H2.1@24661.08,24223.41 ; 24535.08,27173.41 H3.1@24661.08,27173.41 ; 24661.08,24097.4 H2.1@24661.08,24223.41 ; 24661.08,24349.41 H2.1@24661.08,24223.41 ; 24661.08,27047.4 H3.1@24661.08,27173.41 ; 24661.08,27299.41 H3.1@24661.08,27173.41 ; 24787.08,24223.41 H2.1@24661.08,24223.41 ; 24787.08,27173.41 H3.1@24661.08,27173.41
  other v1: 23959.22,24559.17 24159.22,24559.17 22461.08,24573.41 22661.08,24573.41 22861.08,24573.41 23061.08,24573.41 23261.08,24573.41 20859.22,24659.17 21059.22,24659.17 23959.22,24659.17 24159.22,24659.17 21625.08,24662.41 21257.22,24664.17 21457.22,24664.17 22461.08,24673.41 22661.08,24673.41 22861.08,24673.41 23061.08,24673.41 23261.08,24673.41 20859.22,24759.17 21059.22,24759.17 23959.22,24759.17 24159.22,24759.17 21625.08,24760.41 21257.22,24764.17 21457.22,24764.17 22461.08,24773.41 22661.08,24773.41 22861.08,24773.41 23061.08,24773.41 23261.08,24773.41 23959.22,24859.17 24159.22,24859.17 22461.08,24873.41 22661.08,24873.41 22861.08,24873.41 23061.08,24873.41 23261.08,24873.41 23959.22,24959.17 24159.22,24959.17 24415.08,24970.41 24580.08,24970.41 22461.08,24973.41 22661.08,24973.41 22861.08,24973.41 23061.08,24973.41 23261.08,24973.41 24162.08,25306.41 24503.08,25359.41 21381.08,25391.41 21499.08,25394.41 21500.08,25468.41 21382.08,25471.41 21016.08,25475.41 21497.08,25538.41 21381.08,25540.41 22283.08,25555.41 23320.08,25577.41 22793.08,25705.41 24336.08,25727.41 21266.08,25820.41 21338.08,25821.41 20661.08,25873.41 22015.08,25881.41 21271.08,25897.41 21403.08,25898.41 21339.08,25899.41 21013.08,25905.41 20949.08,25906.41 24144.08,25913.41 22971.08,25916.41 23689.08,25923.41 23517.08,25929.41 20661.08,25973.41 21353.09,25975.04 21012.08,26014.41 20951.08,26015.41 22291.08,26020.41 22373.08,26053.41 20661.08,26073.41 20661.08,26173.41 21042.08,26176.41 21385.09,26191.04 21298.09,26193.04 23357.08,26198.41 23191.08,26201.41 21671.08,26219.41 22775.08,26232.41 22875.08,26232.41 23055.08,26237.41 22961.08,26238.41 21386.09,26271.04 21298.09,26272.04 20661.08,26273.41 24461.08,26273.41 24661.08,26273.41 21766.08,26280.41 21678.08,26284.41 21591.08,26286.41 21766.08,26363.41 21679.08,26364.41 21591.08,26365.41 24461.08,26373.41 24661.08,26373.41 23767.08,26412.41 20661.08,26473.41 22761.08,26473.41 22861.08,26473.41 22961.08,26473.41 23061.08,26473.41 23161.08,26473.41 24461.08,26473.41 24661.08,26473.41 20661.08,26573.41 24461.08,26573.41 24661.08,26573.41 21250.63,26595.06 21186.63,26596.06 23008.08,26624.41 23117.08,26624.41 21187.63,26648.06 21250.63,26648.06 24039.45,26649.85 20661.08,26673.41 24461.08,26673.41 24661.08,26673.41 21249.63,26704.06 21188.63,26705.06 23009.08,26726.41 23504.08,26726.41 23220.08,26727.41 23118.08,26729.41 23426.08,26729.41 21625.08,26747.41 24039.45,26749.85 20661.08,26773.41 24039.45,26832.85 21931.63,26852.06 21621.08,26868.41 20661.08,26873.41 21055.63,26892.06 20991.63,26893.06 21931.63,26905.06 23426.08,26930.41 24039.45,26932.85 20992.63,26945.06 21055.63,26945.06 21930.63,26961.06 21054.63,27001.06 20993.63,27002.06 21761.08,27073.41 21861.08,27073.41 21961.08,27073.41 22061.08,27073.41 22161.08,27073.41 22261.08,27073.41 22361.08,27073.41 22461.08,27073.41 22561.08,27073.41 22661.08,27073.41 22761.08,27073.41 22861.08,27073.41 22961.08,27073.41 23061.08,27073.41 23161.08,27073.41
  other v2: 21216.08,25388.41
GPX0_0: CON1.36 R13.1 U5.10 | length 2826.1
  TOP w7: CON1.36@22519.2,26553.41 22519.2,26404.79 22525.08,26398.91 v2(22525.08,26379.41) ; U5.10@24517.88,25508.41 24517.88,25638.21 24569.08,25689.41 R13.1@24569.08,25689.91 24588.58,25689.91 24612.08,25713.41 24612.08,25766.91 24587.58,25791.41 v2(24568.08,25791.41)
  BOTTOM w7: v2(22525.08,26379.41) 22544.58,26379.41 22545.58,26378.41 23936.08,26378.41 24506.08,25808.41 24551.08,25808.41 v2(24568.08,25791.41)
I2C_SCL7: CON1.34 U5.12 | length 2709.8
  TOP w7: v2(22471.08,26324.41) 22471.08,26343.91 22479.83,26352.65 CON1.34@22479.83,26553.41 ; v2(24451.08,25608.41) 24466.68,25592.81 U5.12@24466.68,25508.41
  BOTTOM w7: v2(22471.08,26324.41) 22490.58,26324.41 22494.58,26328.41 23886.08,26328.41 24451.08,25763.41 v2(24451.08,25608.41)
I2C_SDA7: CON1.33 U5.11 | length 2765.1
  TOP w7: v2(22441.08,26368.41) 22460.15,26387.47 CON1.33@22460.15,26553.41 ; U5.11@24492.28,25508.41 24492.28,25684.61 24501.08,25693.41 v2(24501.08,25768.41)
  BOTTOM w7: v2(22441.08,26368.41) 22459.87,26349.62 23919.87,26349.62 v2(24501.08,25768.41)
LCD_DEN: CON1.25 U7.26 | length 990
  TOP w7: CON1.25@22302.67,26553.41 22302.67,26236.82 v2(22361.08,26178.41) ; U7.26@22717.77,25956.05 22717.77,26160.6 22721.08,26163.91 v2(22721.08,26183.41)
  BOTTOM w7: v2(22361.08,26178.41) 22696.58,26178.41 22701.58,26183.41 v2(22721.08,26183.41)
LCD_HSYNC: CON1.30 U7.30 | length 833.3
  TOP w7: v2(22382.22,26277.41) 22401.08,26296.27 22401.08,26297.91 CON1.30@22401.09,26553.41 ; v2(22594.08,26273.41) 22594.08,26125.41 22639.03,26080.46 U7.30@22639.03,25956.05
  BOTTOM w7: v2(22382.22,26277.41) 22401.72,26277.41 22405.72,26273.41 v2(22594.08,26273.41)
LCD_VD3: CON1.24 U6.47 | length 1273.2
  TOP w7: v2(21610.08,26045.41) 21610.08,26025.91 21624.39,26011.6 U6.47@21624.39,25951.05 ; CON1.24@22282.98,26553.41 22282.98,26113.01 22293.08,26102.91 v2(22293.08,26083.41)
  BOTTOM w7: v2(21610.08,26045.41) 22255.08,26045.41 v2(22293.08,26083.41)
LCD_VD4: CON1.23 U6.46 | length 1347.7
  TOP w7: v2(21576.08,26053.41) 21591.58,26068.91 21619.58,26068.91 21644.07,26044.41 U6.46@21644.07,25951.05 ; v2(22244.08,26068.91) 22263.29,26088.12 CON1.23@22263.29,26553.41
  BOTTOM w7: v2(21576.08,26053.41) 21591.08,26068.41 21602.09,26068.41 21602.59,26068.91 21619.58,26068.91 21623.08,26065.41 22221.08,26065.41 22224.58,26068.91 v2(22244.08,26068.91)
LCD_VD5: CON1.22 U6.44 | length 1229.3
  TOP w7: v2(21631.08,26088.91) 21683.44,26036.55 U6.44@21683.44,25951.05 ; v2(22207.08,26089.04) 22226.58,26089.04 22226.95,26089.41 22228.2,26089.41 22243.61,26104.82 CON1.22@22243.61,26553.41
  BOTTOM w7: v2(21631.08,26088.91) 21633.58,26086.41 22204.45,26086.41 v2(22207.08,26089.04)
LCD_VD6: CON1.21 U6.43 | length 1184.8
  TOP w7: v2(21656.08,26109.41) 21703.13,26062.35 U6.43@21703.13,25951.05 ; v2(22216.08,26118.41) 22216.08,26137.91 22223.92,26145.75 CON1.21@22223.92,26553.41
  BOTTOM w7: v2(21656.08,26109.41) 21662.08,26103.41 22186.08,26103.41 22201.08,26118.41 v2(22216.08,26118.41)
LCD_VD7: CON1.19 U6.41 | length 1155
  TOP w7: v2(21681.08,26129.91) 21742.5,26068.49 U6.41@21742.5,25951.05 ; v2(22184.08,26134.41) 22197.87,26148.19 22199.87,26148.19 22205.97,26154.3 22205.97,26408.51 22184.55,26429.93 CON1.19@22184.55,26553.41
  BOTTOM w7: v2(21681.08,26129.91) 21700.58,26129.91 21709.87,26120.62 22170.29,26120.62 v2(22184.08,26134.41)
LCD_VD10: CON1.18 U6.40 | length 1020.5
  TOP w7: U6.40@21762.18,25951.05 21762.18,26125 21766.08,26128.91 v2(21766.08,26148.41) ; CON1.18@22164.87,26553.41 22164.87,26503.91 22166.08,26502.69 22166.08,26403.4 22185.47,26384.01 22185.47,26187.3 22183.08,26184.91 v2(22183.08,26165.41)
  BOTTOM w7: v2(21766.08,26148.41) 22165.47,26148.41 22168.68,26151.62 22169.29,26151.62 v2(22183.08,26165.41)
LCD_VD11: CON1.17 U6.38 | length 1101.6
  TOP w7: v2(21731.08,26152.41) 21749.58,26170.91 21778.58,26170.91 21801.55,26147.94 U6.38@21801.55,25951.05 ; CON1.17@22145.18,26553.41 22145.18,26389.3 22156.08,26378.41 22156.08,26194.91 22154.08,26192.91 v2(22154.08,26173.41)
  BOTTOM w7: v2(21731.08,26152.41) 21750.08,26171.41 22152.08,26171.41 v2(22154.08,26173.41)
LCD_VD12: CON1.16 U6.37 | length 1071.5
  TOP w7: v2(21731.08,26188.41) 21750.58,26188.41 21752.58,26186.41 21786.08,26186.41 21821.24,26151.24 U6.37@21821.24,25951.05 ; CON1.16@22125.5,26553.41 22125.5,26343.99 22131.08,26338.41 v2(22131.08,26193.91)
  BOTTOM w7: v2(21731.08,26188.41) 21750.58,26188.41 21752.58,26186.41 22111.08,26186.41 22118.58,26193.91 v2(22131.08,26193.91)
LCD_VD13: CON1.15 U6.36 | length 982
  TOP w7: v2(21766.08,26208.91) 21785.58,26208.91 21840.92,26153.57 U6.36@21840.92,25951.05 ; CON1.15@22105.81,26553.41 22105.81,26233.34 22106.02,26233.14 v2(22106.02,26213.64)
  BOTTOM w7: v2(21766.08,26208.91) 22101.29,26208.91 v2(22106.02,26213.64)
LCD_VD14: CON1.14 U6.35 | length 1044.9
  TOP w7: v2(21731.08,26233.41) 21791.08,26233.41 21860.61,26163.88 U6.35@21860.61,25951.05 ; v2(22081.08,26233.41) 22081.08,26263.41 22086.13,26268.45 CON1.14@22086.13,26553.41
  BOTTOM w7: v2(21731.08,26233.41) 21750.58,26233.41 21752.58,26231.41 22059.58,26231.41 22061.58,26233.41 v2(22081.08,26233.41)
LCD_VD15: CON1.13 U6.33 | length 793.9
  TOP w7: v2(21876.08,26253.91) 21899.98,26230 U6.33@21899.98,25951.05 ; v2(22056.08,26258.41) 22056.08,26278.41 22066.44,26288.77 CON1.13@22066.44,26553.41
  BOTTOM w7: v2(21876.08,26253.91) 22006.08,26253.91 22010.58,26258.41 v2(22056.08,26258.41)
LCD_VD19: CON1.12 U6.32 | length 902.1
  TOP w7: v2(21825.08,26254.41) 21844.58,26254.41 21866.58,26276.41 21888.08,26276.41 21919.66,26244.83 U6.32@21919.66,25951.05 ; v2(22041.08,26298.41) 22041.08,26317.91 22046.76,26323.58 CON1.12@22046.76,26553.41
  BOTTOM w7: v2(21825.08,26254.41) 21844.58,26254.41 21874.79,26284.62 22027.29,26284.62 v2(22041.08,26298.41)
LCD_VD20: CON1.10 U6.30 | length 890.7
  TOP w7: v2(21825.08,26284.41) 21844.58,26284.41 21858.58,26298.41 21891.08,26298.41 21959.03,26230.46 U6.30@21959.03,25951.05 ; CON1.10@22007.39,26553.41 22007.39,26472.1 22016.08,26463.41 v2(22016.08,26318.91)
  BOTTOM w7: v2(21825.08,26284.41) 21844.58,26284.41 21879.08,26318.91 v2(22016.08,26318.91)
LCD_VD21: CON1.9 U6.29 | length 867.4
  TOP w7: v2(21825.08,26316.41) 21903.08,26316.41 21978.72,26240.76 U6.29@21978.72,25951.05 ; CON1.9@21987.7,26553.41 21987.7,26426.78 21996.08,26418.41 21996.08,26361.41 21991.08,26356.41 v2(21991.08,26343.41)
  BOTTOM w7: v2(21825.08,26316.41) 21844.58,26316.41 21871.58,26343.41 v2(21991.08,26343.41)
LCD_VD22: CON1.8 U6.27 | length 859.5
  TOP w7: v2(21825.08,26346.41) 21898.08,26346.41 22018.09,26226.4 U6.27@22018.09,25951.05 ; CON1.8@21968.02,26553.41 21968.02,26390.97 21971.08,26387.91 v2(21971.08,26368.41)
  BOTTOM w7: v2(21825.08,26346.41) 21847.08,26368.41 v2(21971.08,26368.41)
LCD_VD23: CON1.7 U6.26 | length 639.4
  TOP w7: CON1.7@21948.33,26553.41 21948.33,26326.15 22037.77,26236.72 U6.26@22037.77,25951.05
LCD_VOTCLK: CON1.28 U7.29 | length 872.1
  TOP w7: CON1.28@22361.72,26553.41 22361.72,26288.73 22359.72,26286.73 22359.72,26268.08 22368.29,26259.51 22368.29,26259.19 v2(22382.08,26245.41) ; v2(22631.08,26248.41) 22631.08,26133.41 22658.72,26105.76 U7.29@22658.72,25956.05
  BOTTOM w7: v2(22382.08,26245.41) 22401.58,26245.41 22404.58,26248.41 v2(22631.08,26248.41)
LCD_VSYNC: CON1.26 U7.27 | length 957
  TOP w7: CON1.26@22322.35,26553.41 22322.35,26262.14 v2(22376.08,26208.41) ; v2(22676.08,26228.41) 22676.08,26148.41 22698.08,26126.41 22698.08,25999.35 U7.27@22698.09,25956.05
  BOTTOM w7: v2(22376.08,26208.41) 22656.08,26208.41 v2(22676.08,26228.41)
LED+: C3.2 CON2.2 D1.2 U1.5 | length 1977.9
  TOP w10: CON2.2@23912.9,26022.41 23912.9,26110.22 23916.08,26113.41
  TOP w15: 23680.59,27110.42 23680.59,27112.92 23697.58,27129.91
  TOP w20: U1.5@23652.78,26878.41 23601.08,26878.41 23586.08,26893.41 23586.08,27013.41 23631.08,27058.41 D1.2@23680.59,27058.41 23680.59,27110.42 23697.58,27127.41 23697.58,27129.91 C3.2@23697.58,27153.41
  TOP w30: 23697.58,27129.91 23721.08,27153.41 23931.08,27153.41 24126.08,26958.41 24126.08,26438.41 23916.08,26228.41 23916.08,26113.41
LED-: CON2.1 R1.1 U1.3 | length 1263.4
  TOP w10: CON2.1@23932.58,26022.41 23932.58,26057.41 23963.58,26088.41
  TOP w20: 23913.09,26893.4 23928.1,26908.41 R1.1@23929.58,26908.41
  TOP w30: U1.3@23739.38,26915.81 23890.68,26915.81 23913.09,26893.4 23929.58,26876.91 v3(23929.58,26506.91) ; 23963.58,26088.41 23963.58,26110.91 v3(24146.08,26293.41)
  BOTTOM w30: v3(23929.58,26506.91) 24143.08,26293.41 v3(24146.08,26293.41)
MD_RSTN: CON1.35 U7.46 | length 670
  TOP w7: U7.46@22324.07,25956.05 22324.07,25998.05 22326.08,26000.06 22326.08,26048.41 22499.51,26221.84 CON1.35@22499.51,26553.41
N02294: R11.1 U5.13 | length 202.1
  TOP w7: U5.13@24441.08,25508.41 24441.08,25583.41 24421.08,25603.41 24421.08,25638.41 24446.08,25663.41 R11.1@24446.08,25691.91
N02298: R12.1 U5.14 | length 193.6
  TOP w7: R12.1@24391.08,25691.91 24391.08,25608.41 24415.48,25584 U5.14@24415.48,25508.41
N02404: TP1.1 U5.16 | length 153.2
  TOP w15: TP1.1@24296.08,25633.41 24364.28,25565.21 U5.16@24364.28,25508.41
N321884: L2.1 U3.3 | length 150.7
  TOP w30: U3.3@20987.08,26380.41 21028.08,26380.41 21066.08,26418.41 L2.1@21122.03,26418.41
N321888: R3.2 R8.1 U3.5 | length 194.9
  TOP w10: U3.5@20885.08,26306.41 20891.08,26306.41 20929.58,26267.91 R8.1@20929.58,26193.41 R3.2@20929.58,26133.41
N322800: L3.1 U4.3 | length 172.4
  TOP w30: U4.3@20977.08,25685.41 21075.47,25685.41 21093.47,25703.41 L3.1@21142.03,25703.41
N322804: R9.2 R10.1 U4.5 | length 216.4
  TOP w12: U4.5@20875.08,25611.41 20875.08,25564.41 20919.58,25519.91 R10.1@20919.58,25473.41 R9.2@20919.58,25413.41
N323503: D1.1 L1.2 U1.1 | length 596.5
  TOP w15: U1.1@23739.38,26841.01 23746.98,26833.41 v2(23806.08,26833.41) ; D1.1@23816.57,27058.41 23886.08,27058.41 v2(23916.08,27028.41)
  TOP w30: U1.1@23739.38,26841.01 23739.38,26808.19 23755.14,26792.44 L1.2@23755.14,26673.41
  BOTTOM w15: v2(23806.08,26833.41) 23916.08,26943.41 v2(23916.08,27028.41)
N332264: CON2.3 R17.1 | length 270.1
  TOP w7: R17.1@23771.08,26241.91 23771.08,26208.41 23893.21,26086.28 CON2.3@23893.21,26022.41
N334265: CON2.35 R18.1 | length 262.7
  TOP w7: CON2.35@23263.29,26022.41 23263.29,26254.12 23271.08,26261.91 R18.1@23271.08,26281.91
N334269: CON2.36 R19.1 | length 270.9
  TOP w7: R19.1@23216.08,26281.91 23216.08,26281.41 23243.61,26253.88 CON2.36@23243.61,26022.41
N337628: R25.1 U7.25 | length 89
  TOP w15: U7.25@22737.46,25956.05 22801.72,25956.05 22802.58,25956.91 R25.1@22826.08,25956.91
N337730: R23.1 U7.24 | length 100.6
  TOP w12: U7.24@22737.46,25660.76 22755.46,25660.76 22784.32,25631.91 R23.1@22826.08,25631.91
N337734: R21.1 U7.1 | length 120
  TOP w10: R21.1@22226.08,25574.91 22226.08,25575.41 22243.86,25593.19 22260.62,25593.19 22284.7,25617.26 U7.1@22284.7,25660.76
N338218: R24.1 U6.24 | length 162.8
  TOP w10: U6.24@22057.46,25655.76 22057.46,25567.02 22082.58,25541.91 R24.1@22121.08,25541.91
N338394: R22.2 U7.48 | length 60.3
  TOP w10: R22.2@22226.08,25951.91 22247.08,25951.91 22251.22,25956.05 U7.48@22284.7,25956.05
N338646: R20.1 U6.48 | length 99
  TOP w10: R20.1@21506.08,25951.91 21527.08,25951.91 21527.94,25951.05 U6.48@21604.7,25951.05
N338650: R26.1 U6.25 | length 69
  TOP w10: U6.25@22057.46,25951.05 22104.22,25951.05 22105.08,25951.91 R26.1@22126.08,25951.91
N362187: Q1.1 R28.1 R29.1 | length 145.8
  TOP w7: Q1.1@21164.58,26075.66 21211.83,26075.66 21230.58,26094.41 R29.1@21250.58,26094.41 R28.1@21250.58,26042.41
TP_EN: Q1.3 R15.1 R16.1 R27.2 U3.1 U4.1 | length 1436.6
  TOP w7: U3.1@20987.08,26306.41 21056.58,26306.41 v2(21119.08,26243.91) 21144.58,26243.91 21164.08,26263.41 R15.1@21164.58,26263.41 ; v2(21036.08,25613.41) 21008.58,25613.41 21006.58,25611.41 U4.1@20977.08,25611.41 20977.08,25592.41 20996.08,25573.41 21167.08,25573.41 21192.58,25547.91 R16.1@21192.58,25528.41 ; v2(21168.08,25945.41) 21160.67,25952.82 21152.99,25952.82 21126.58,25979.22 Q1.3@21126.58,25983.16 21155.77,25983.16 21163.02,25990.41 R27.2@21251.58,25990.41
  BOTTOM w7: v2(21036.08,25613.41) 21036.08,25813.41 v2(21168.08,25945.41) 21168.08,26194.91 v2(21119.08,26243.91)